# Altium PCB PCB_Air_Quality_chipout.pcbdoc
Units mm, origin at the board's own origin, x right, y up, seen from the top; angles counter-clockwise.
Board outline 125.48 x 101.47 mm, 2 copper layers (Top Layer, Bottom Layer); 49 components, 34 nets, 123 pads, 32 vias.
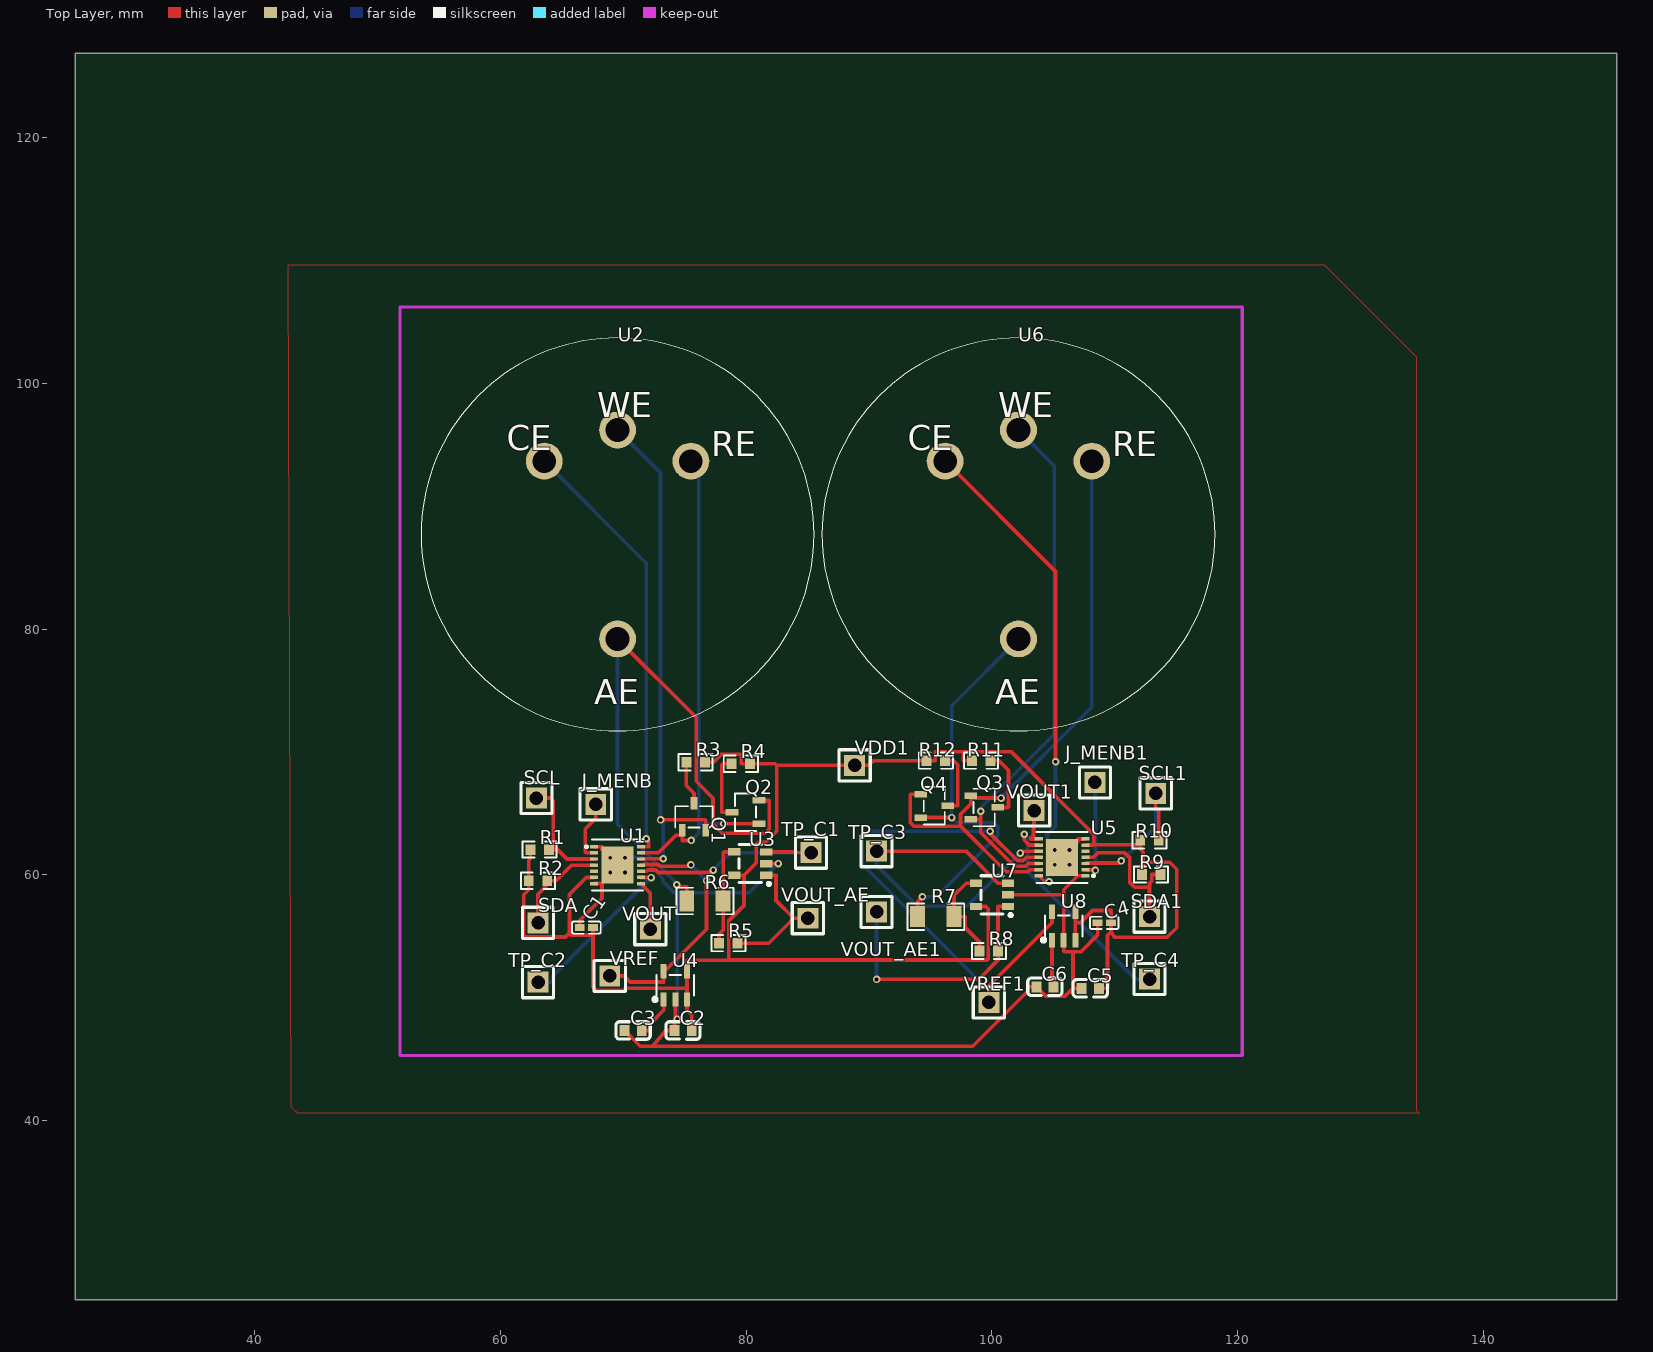
[diagram p0: Top Layer view]
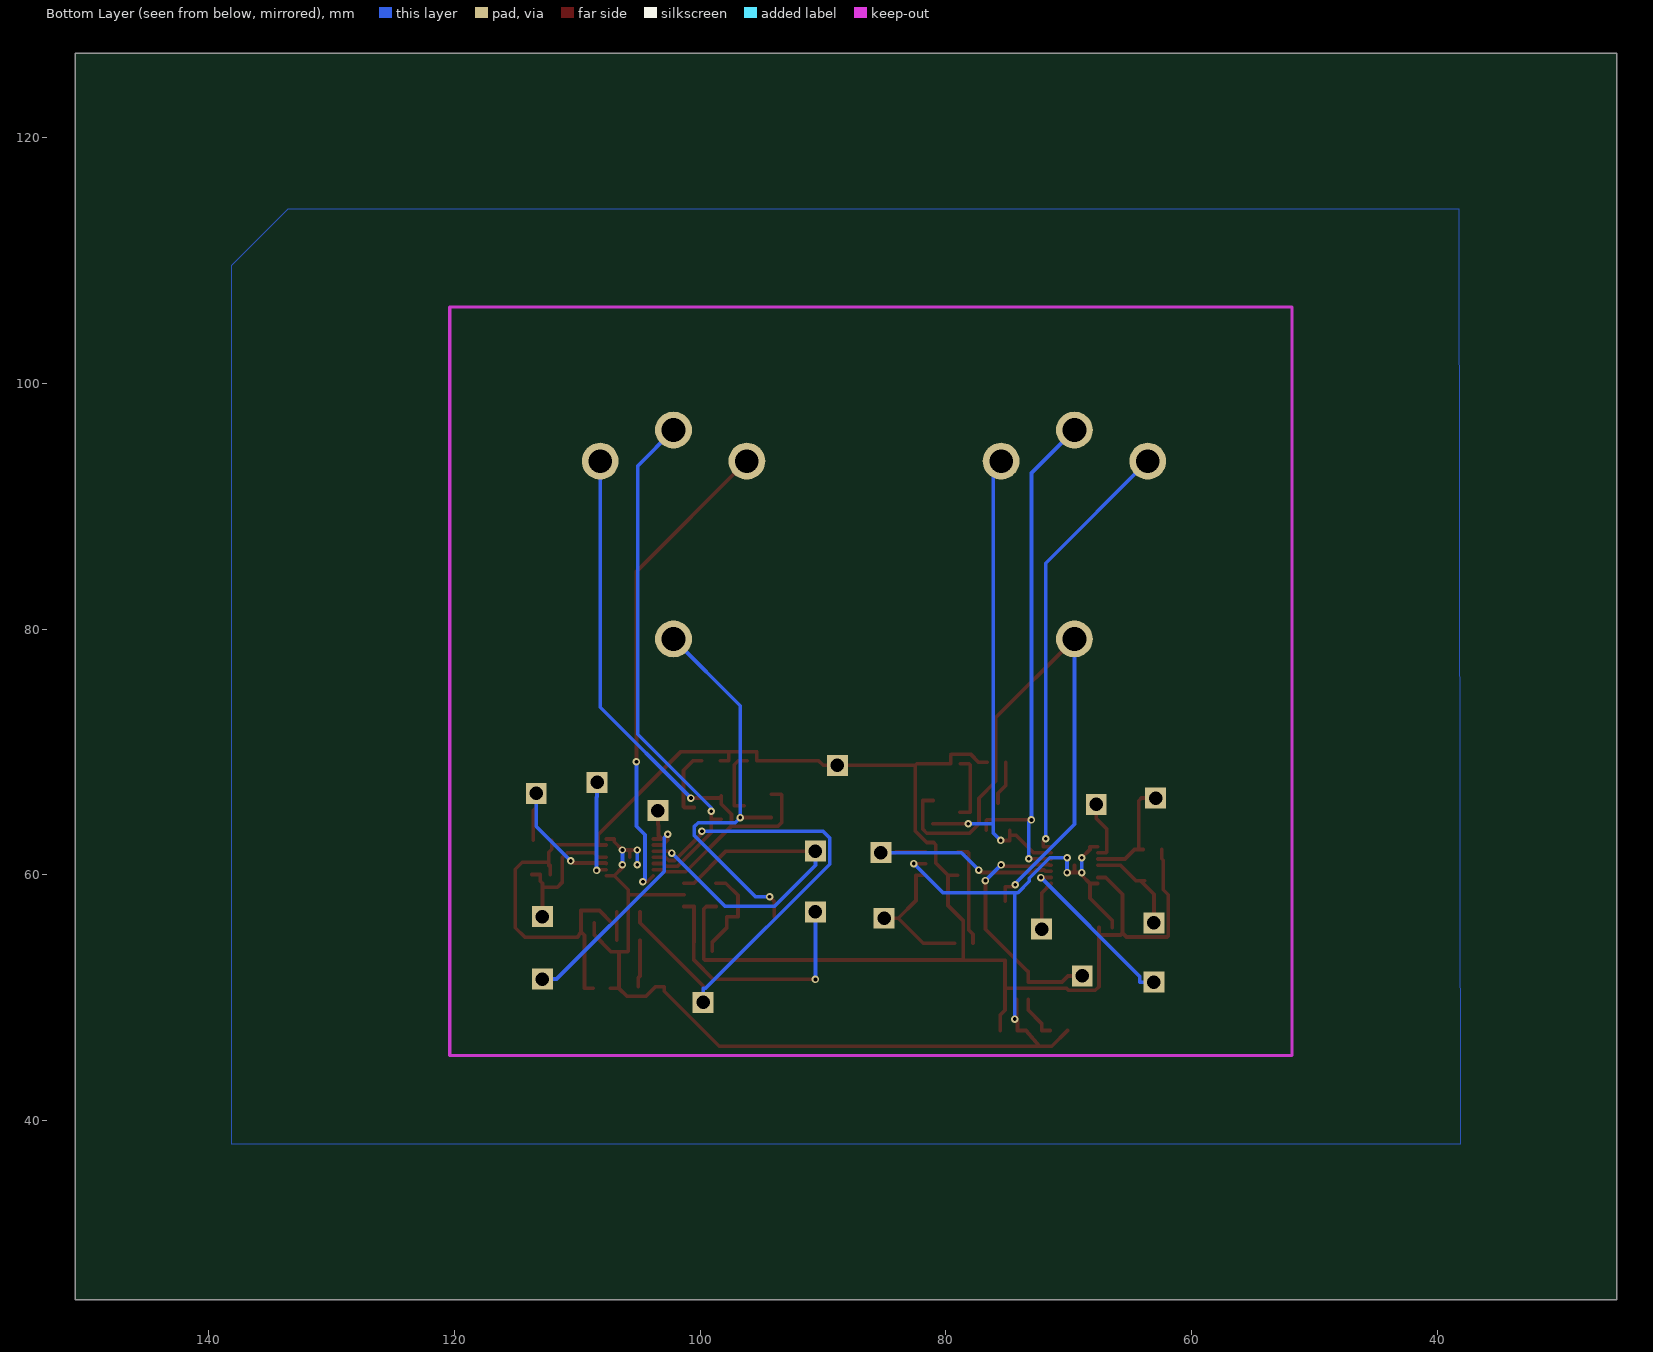
[diagram p1: Bottom Layer view, seen from below]

## Layer stack, top to bottom
Top Layer: signal copper (thickness not stored)
Dielectric: dielectric 0.32, FR-4, Dk 4.8
Bottom Layer: signal copper (thickness not stored)

## Board outline
150.876,25.4 25.4,25.4 25.4,126.873 150.876,126.873

## Components (designator, comment, footprint, x,y, rotation, side; value= is the part's Value field where it differs from the comment)
C1 "100nF" C0402 67.001,55.704 r0 top
C2 "100nF" C0603 74.875,47.322 r0 top
C3 "56pF" C0603 70.811,47.322 r0 top
C4 "100nF" C0402 109.165,56.085 r0 top
C5 "100nF" C0603 108.022,50.751 r0 top
C6 "56pF" C0603 104.339,50.878 r0 top
J_MENB "Header-Male-2.54_1x1" HDR-TH_1P-P2.54-V-M 67.763,65.737 r0 top
J_MENB1 "Header-Male-2.54_1x1" HDR-TH_1P-P2.54-V-M 108.403,67.515 r0 top
Q1 "MMBFJ177LT1G_C106763" SOT-23-3_L3.0-W1.7-P0.95-LS2.9-BR 75.764,64.721 r270 top
Q2 "MMBFJ177LT1G_C106763" SOT-23-3_L3.0-W1.7-P0.95-LS2.9-BR 79.955,65.102 r0 top
Q3 "MMBFJ177LT1G_C106763" SOT-23-3_L3.0-W1.7-P0.95-LS2.9-BR 99.386,65.483 r180 top
Q4 "MMBFJ177LT1G_C106763" SOT-23-3_L3.0-W1.7-P0.95-LS2.9-BR 95.322,65.61 r180 top
R1 "10K" R0603 63.191,62.054 r0 top
R2 "10K" R0603 63.064,59.514 r0 top
R3 "1K" R0603 75.891,69.166 r0 top
R4 "1K" R0603 79.574,69.039 r0 top
R5 "14K" R0603 78.558,54.434 r0 top
R6 "10" R1206 76.653,57.863 r0 top
R7 "10" R1206 95.449,56.593 r0 top
R8 "14K" R0603 99.767,53.799 r0 top
R9 "10K" R0603 112.975,60.022 r0 top
R10 "10K" R0603 112.848,62.816 r0 top
R11 "1K" R0603 99.132,69.293 r180 top
R12 "1K" R0603 95.449,69.293 r180 top
SCL "Header-Male-2.54_1x1" HDR-TH_1P-P2.54-V-M 62.937,66.245 r0 top
SCL1 "Header-Male-2.54_1x1" HDR-TH_1P-P2.54-V-M 113.356,66.626 r0 top
SDA "Header-Male-2.54_1x1" HDR-TH_1P-P2.54-V-M 63.064,56.085 r0 top
SDA1 "Header-Male-2.54_1x1" HDR-TH_1P-P2.54-V-M 112.848,56.593 r0 top
TP_C1 "Header-Male-2.54_1x1" HDR-TH_1P-P2.54-V-M 85.289,61.8 r0 top
TP_C2 "Header-Male-2.54_1x1" HDR-TH_1P-P2.54-V-M 63.064,51.259 r0 top
TP_C3 "Header-Male-2.54_1x1" HDR-TH_1P-P2.54-V-M 90.623,61.927 r0 top
TP_C4 "Header-Male-2.54_1x1" HDR-TH_1P-P2.54-V-M 112.848,51.513 r0 top
U1 "LMP91000SDE/NOPB" WSON-14_L4.0-W4.0-P0.50-BL-EP 69.541,60.784 r270 top
U2 "NO-B4" "ALPHASENSE B1" 69.541,87.708 r0 top
U3 "LMP2231AMFE/NOPB" SOT-23-5_L3.0-W1.7-P0.95-LS2.8-BR 80.336,60.911 r0 top
U4 "LM4120AIM5X-2.5/NOPB" SOT-23-5_L3.0-W1.7-P0.95-LS2.8-BL 74.24,51.005 r0 top
U5 "LMP91000SDE/NOPB" WSON-14_L4.0-W4.0-P0.50-BL-EP 105.736,61.419 r90 top
U6 "NO-B4" "ALPHASENSE B1" 102.18,87.708 r0 top
U7 "LMP2231AMFE/NOPB" SOT-23-5_L3.0-W1.7-P0.95-LS2.8-BR 100.021,58.371 r0 top
U8 "LM4120AIM5X-2.5/NOPB" SOT-23-5_L3.0-W1.7-P0.95-LS2.8-BL 105.863,55.831 r0 top
VDD1 "Header-Male-2.54_1x1" HDR-TH_1P-P2.54-V-M 88.845,68.912 r0 top
VOUT "Header-Male-2.54_1x1" HDR-TH_1P-P2.54-V-M 72.208,55.577 r0 top
VOUT1 "Header-Male-2.54_1x1" HDR-TH_1P-P2.54-V-M 103.45,65.229 r0 top
VOUT_AE "Header-Male-2.54_1x1" HDR-TH_1P-P2.54-V-M 85.035,56.466 r0 top
VOUT_AE1 "Header-Male-2.54_1x1" HDR-TH_1P-P2.54-V-M 90.623,56.974 r0 top
VREF "Header-Male-2.54_1x1" HDR-TH_1P-P2.54-V-M 68.906,51.767 r0 top
VREF1 "Header-Male-2.54_1x1" HDR-TH_1P-P2.54-V-M 99.767,49.608 r0 top
? "" ? 65.731,94.058 r0 top
? "" ? 98.37,94.058 r0 top

## Footprints (in the part's own frame and the unit in brackets; to place one, negate y for a bottom-side part, rotate by r counter-clockwise, add the part's x,y. Pads: shape width x height; smd on the part's side, far side on the other; paste and mask are expansions set on the pad)
"ALPHASENSE B1" [mm]
  silkscreen extent -16,-16 16,16
C0402 [mm]
  rect 0.79x0.54 smd paste-100 mask+0.051: 1(-0.545,0) 2(0.545,0)
  silkscreen extent -1.17,-0.5 1.17,0.5
C0603 [mm]
  rect 0.8x0.9 smd paste+0 mask+0.051: 1(-0.7,0) 2(0.7,0)
  silkscreen extent -1.41,-0.71 1.39,0.72
HDR-TH_1P-P2.54-V-M [mm]
  rect 1.7x1.7 hole 1.1 paste+0 mask+0.051: 1(0,0)
  silkscreen extent -1.27,-1.27 1.27,1.27
R0603 [mm]
  rect 0.806x0.864 smd paste-100 mask+0.051: 1(-0.753,0) 2(0.753,0)
  silkscreen extent -1.39,-0.66 1.39,0.66
R1206 [mm]
  rect 1.208x1.701 smd paste-100 mask+0.051: 1(-1.479,0) 2(1.479,0)
  silkscreen extent -2.31,-1.08 2.31,1.08
SOT-23-3_L3.0-W1.7-P0.95-LS2.9-BR [mm]
  rect 1.037x0.532 smd paste+0 mask+0.051: 1(1.101,-0.95) 2(1.101,0.95) 3(-1.101,0)
  silkscreen extent -0.86,-1.53 0.86,1.53
SOT-23-5_L3.0-W1.7-P0.95-LS2.8-BL [mm]
  rect 0.49x1.157 smd paste+0 mask+0.051: 1(-0.95,-1.154) 2(0,-1.154) 3(0.95,-1.154)
  rect 0.49x1.175 smd paste+0 mask+0.051: 4(0.95,1.154) 5(-0.95,1.154)
  silkscreen extent -1.8,-1.29 1.53,0.85
SOT-23-5_L3.0-W1.7-P0.95-LS2.8-BR [mm]
  rect 1x0.6 smd paste+0 mask+0.051: 1(1.3,-0.95) 2(1.3,0) 3(1.3,0.95) 4(-1.3,0.95) 5(-1.3,-0.95)
  silkscreen extent -0.9,-1.78 1.65,1.55
WSON-14_L4.0-W4.0-P0.50-BL-EP [mm]
  rect 0.28x0.665 smd paste+0 mask+0.051: 1(-1.5,-1.908) 2(-1,-1.908) 3(-0.5,-1.908) 4(0,-1.908) 5(0.5,-1.908) 6(1,-1.908) 7(1.5,-1.908) 8(1.5,1.907) 9(1,1.907) 10(0.5,1.907) 11(0,1.907) 12(-0.5,1.907) 13(-1,1.907) 14(-1.5,1.907)
  rect 3x2.6 smd paste+0 mask+0.051: 15(0,0)
  silkscreen extent -2.08,-2.64 2.08,2.08
? [mm]

## Free pads (board coordinates)
  round 3 hole 1.93 paste+0 mask+0.102: 1(69.541,96.208) 1(102.18,96.208) 2(63.572,93.677) 2(96.211,93.677) 3(75.51,93.677) 3(108.149,93.677) 4(69.541,79.199) 4(102.18,79.199)

## Via types
v1: diameter 0.61, hole 0.305, Top Layer to Bottom Layer, tented both sides, 32 vias

## Nets (pads, with @x,y where several pads share a name; then routed paths per layer and width w, separated by ;. In a path a pad name is that pad's centre, name@x,y a point inside that pad or via, vN(x,y) a via of type N, cw(c..) or ccw(c..) an arc to the next point about the centre after c; other vN are vias at no path point)
C3_2: C3.2 U4.1 | length 3.7
  Top Layer w0.3: C3.2 72.214,47.322 72.214,47.894 73.29,48.97 U4.1
GND: C1.1 C2.1 C3.1 C4.1 C5.1 C6.1 U1.1 U1.7 U1.15 U3.2 U4.2 U5.1 U5.7 U5.15 U7.2 U8.2 | length 110.1
  Top Layer w0.3: C1.1 66.456,56.276 68.269,58.088 U1.15@68.269,59.284 ; U1.7 U1.15@68.269,59.284 ; U1.1 68.269,62.284 68.269,62.057 v1(68.941,61.384) ; U1.15 U1.15@69.541,60.184 ; C3.1 71.397,46.038 72.372,46.038 ; v1(70.141,60.184) U1.15@69.541,60.184 ; U4.2 v1@74.24,48.259 ; v1(74.396,48.259) v1@74.24,48.259 ; U3.2 v1(82.614,60.911) ; U7.2 102.124,58.371 105.863,58.371 ; 102.936,50.879 102.936,50.526 98.448,46.038 72.372,46.038 ; 102.937,50.878 C6.1 104.394,50.124 105.993,50.124 106.62,50.751 ; v1(105.136,62.019) U5.15@105.736,62.018 ; U5.15 U5.15@105.736,62.018 ; v1(106.336,60.818) 106.336,60.591 U5.15@107.009,59.919 ; C5.1 106.62,50.751 ; U5.1@107.644,59.919 U5.15@107.009,59.919 ; U5.7@107.644,62.919 107.009,62.919 107.009,62.691 v1(106.337,62.018) U5.15@105.736,62.018 ; C4.1 108.62,55.1 107.265,53.744 106.62,53.744 ; U1.15@68.269,59.284 68.941,59.956 v1(68.941,60.184) U1.15@69.541,60.184 ; 72.372,46.038 73.473,47.322 C2.1 74.175,48.074 74.24,48.139 v1@74.24,48.259 ; 105.863,58.371 105.863,58.773 U5.15@107.009,59.919 ; 105.863,58.371 105.863,55.558 U8.2 105.863,54.237 105.863,53.796 105.915,53.744 106.62,53.744 ; 106.62,50.751 106.62,53.744
  Bottom Layer w0.3: v1@68.942,60.184 v1(68.941,61.384) ; v1(70.141,60.184) v1(70.142,61.384) ; v1(70.142,61.384) 71.56,61.384 73.22,59.724 73.22,59.473 74.145,58.548 74.396,58.548 ; v1(74.396,48.259) 74.396,58.548 ; v1(82.614,60.911) 80.25,58.548 74.396,58.548 ; v1(105.136,60.819) v1(105.136,62.019) ; v1(106.336,60.818) v1(106.337,62.018)
J_MENB1_1: J_MENB1.1 U5.2 | length 8
  Top Layer w0.3: U5.2@107.644,60.419 108.279,60.419 108.382,60.419 v1(108.445,60.355)
  Bottom Layer w0.3: J_MENB1.1 108.403,66.363 108.445,66.321 v1(108.445,60.355)
R3_1: Q1.3 R3.1 | length 3.6
  Top Layer w0.3: R3.1 75.138,67.269 75.764,66.643 Q1.3
R4_1: Q2.3 R4.1 | length 5.5
  Top Layer w0.3: R4.1 78.116,69.039 78.033,68.956 78.033,65.102 Q2.3
R7_1: pad.4@102.18,79.199 Q4.2 R7.1 | length 34.1
  Top Layer w0.3: R7.1 93.971,57.83 v1(94.357,58.216) ; Q4.2 v1(96.741,64.66)
  Bottom Layer w0.3: v1(94.357,58.216) 95.5,58.216 100.488,63.204 100.488,63.929 100.172,64.245 97.156,64.245 v1(96.741,64.66) 96.741,73.76 pad.4@102.18,79.199
R7_2: R7.2 R8.1 U7.4 | length 8.1
  Top Layer w0.3: U7.4 97.919,59.321 96.928,58.33 R7.2 97.834,56.593 97.834,55.713 99.014,54.533 R8.1
R8_2: R8.2 U7.1 VOUT_AE1.1 | length 21.2
  Top Layer w0.3: v1@90.623,51.484 98.941,51.484 100.521,53.064 R8.2 100.521,54.166 100.521,54.533 100.519,54.535 100.519,57.421 U7.1
  Bottom Layer w0.3: v1@90.623,51.484 VOUT_AE1.1
  other v1: 90.623,51.484
R11_1: Q3.3 R11.1 | length 5.7
  Top Layer w0.3: R11.1 100.591,69.293 101.371,68.512 101.371,65.546 101.309,65.483 Q3.3
R12_1: Q4.3 R12.1 | length 5.3
  Top Layer w0.3: R12.1 96.908,69.293 97.245,68.956 97.245,65.61 Q4.3
SCL1_1: R10.2 SCL1.1 U5.3 | length 13.6
  Top Layer w0.3: U5.3@107.644,60.919 107.69,60.965 110.38,60.965 v1(110.545,61.129) ; SCL1.1 113.356,65.474 113.602,65.228 R10.2
  Bottom Layer w0.3: v1(110.545,61.129) 113.356,63.941 SCL1.1
SDA1_1: R9.2 SDA1.1 U5.4 | length 12.2
  Top Layer w0.3: U5.4@107.644,61.419 108.279,61.419 ; 108.278,61.42 108.656,61.796 110.815,61.796 111.249,61.361 111.249,59.375 111.633,58.991 112.85,58.991 112.85,59.286 ; SDA1.1 112.848,57.745 112.848,59.286 113.03,59.499 113.023,60.022 R9.2
TP_C3_1: TP_C3.1 U5.10 U7.3 | length 29.4
  Top Layer w0.3: TP_C3.1 97.913,61.927 100.519,59.321 U7.3 ; v1(102.322,61.767) 102.474,61.919 U5.10
  Bottom Layer w0.3: TP_C3.1 90.623,60.775 93.956,57.442 97.997,57.442 v1(102.322,61.767)
TP_C4_1: TP_C4.1 U5.9 | length 18.5
  Top Layer w0.3: v1(102.65,63.309) 102.65,62.812 103.043,62.419 U5.9
  Bottom Layer w0.3: v1(102.65,63.309) 102.931,63.028 102.931,60.278 111.696,51.513 TP_C4.1
U1_2: J_MENB.1 U1.2 | length 5
  Top Layer w0.3: U1.2 66.999,61.784 66.921,61.862 66.921,63.742 67.763,64.585 J_MENB.1
U1_3: R1.2 SCL.1 U1.3 | length 9.4
  Top Layer w0.3: SCL.1 64.09,66.245 64.298,66.037 R1.2@64.298,62.054 ; R1.2 R1.2@64.298,62.054 ; U1.3 65.42,61.284 64.65,62.054 R1.2@64.298,62.054
U1_4: R2.2 SDA.1 U1.4 | length 8.2
  Top Layer w0.3: SDA.1 63.064,58.408 R2.2@64.171,59.514 ; R2.2 R2.2@64.171,59.514 ; U1.4 65.793,60.784 64.523,59.514 R2.2@64.171,59.514
U1_8: U1.8 VOUT.1 | length 4
  Top Layer w0.3: U1.8@71.449,59.284 72.208,58.524 VOUT.1
U1_9: TP_C2.1 U1.9 | length 13.8
  Top Layer w0.3: U1.9@71.449,59.784 72.084,59.784 72.259,59.784 v1(72.266,59.777)
  Bottom Layer w0.3: TP_C2.1 64.217,51.259 64.217,51.728 v1(72.266,59.777)
U2_1: pad.1@69.541,96.208 Q1.2 U1.12 | length 42.8
  Top Layer w0.3: U1.12@71.449,61.284 71.477,61.312 v1(73.252,61.312) ; v1(73.04,64.469) 76.686,64.469 76.714,64.441 76.714,64.03 Q1.2
  Bottom Layer w0.3: pad.1@69.541,96.208 73.041,92.709 v1(73.04,64.469) 73.252,64.258 v1(73.252,61.312)
U2_2: pad.2@63.572,93.677 U1.14 | length 35.6
  Top Layer w0.3: U1.14@71.449,62.284 72.084,62.284 72.084,62.727 v1(71.882,62.928)
  Bottom Layer w0.3: pad.2@63.572,93.677 71.882,85.367 v1(71.882,62.928)
U2_3: pad.3@75.51,93.677 Q1.1 Q2.1 U1.13 | length 41.8
  Top Layer w0.3: U1.13@71.449,61.784 72.863,61.784 74.288,63.209 Q1.1@74.814,63.209 ; Q1.1 Q1.1@74.814,63.209 ; v1(75.54,62.798) 74.814,62.798 Q1.1@74.814,63.209 ; v1(78.185,64.152) Q2.1
  Bottom Layer w0.3: pad.3@75.51,93.677 76.141,93.046 76.141,64.152 ; v1(75.54,62.798) 76.141,63.4 76.141,64.152 ; v1(78.185,64.152) 76.141,64.152
U2_4: pad.4@69.541,79.199 Q2.2 R6.1 | length 50.5
  Top Layer w0.3: pad.4@69.541,79.199 75.937,72.803 75.937,67.611 77.307,66.241 77.307,64.164 78.08,63.391 81.57,63.391 81.88,63.7 81.88,66.05 81.878,66.052 Q2.2 ; v1(74.361,59.193) 74.538,59.015 75.175,59.015 R6.1
  Bottom Layer w0.3: pad.4@69.541,79.199 69.541,64.117 74.361,59.297 v1(74.361,59.193)
U3_1: R5.2 U3.1 VOUT_AE.1 | length 11.5
  Top Layer w0.3: R5.2 81.851,54.434 83.883,56.466 ; U3.1 82.439,59.961 82.439,57.91 83.883,56.466 ; VOUT_AE.1 83.883,56.466
U3_3: TP_C1.1 U1.10 U3.3 | length 18.3
  Top Layer w0.3: U1.10@71.449,60.284 71.891,60.284 71.994,60.386 72.675,60.386 72.868,60.193 77.138,60.193 v1(77.331,60.386) ; U3.3 84.076,61.861 84.137,61.8 TP_C1.1
  Bottom Layer w0.3: v1(77.331,60.386) 78.745,61.8 TP_C1.1
U3_4: R5.1 R6.2 U3.4 | length 8.4
  Top Layer w0.3: R5.1 77.805,55.168 78.132,55.495 R6.2 78.132,61.759 78.234,61.861 U3.4
U4_5: U1.11 U4.5 VREF.1 | length 20.4
  Top Layer w0.3: VREF.1 70.059,51.767 70.557,51.269 73.29,51.269 U4.5@73.29,52.073 ; U1.11@71.449,60.784 71.591,60.784 71.647,60.84 72.863,60.84 73,60.703 75.416,60.703 v1(75.515,60.802) ; U4.5 U4.5@73.29,52.073 ; v1(76.784,59.533) 76.784,55.566 U4.5@73.29,52.073
  Bottom Layer w0.3: v1(75.515,60.802) v1(76.784,59.533)
U5_12: pad.1@102.18,96.208 Q3.2 U5.12 | length 43.2
  Top Layer w0.3: Q3.2 99.106,64.533 ; v1(99.106,65.175) 99.106,64.533 ; U5.12 102.977,60.919 102.763,60.705 101.848,60.705 99.106,63.446 99.106,64.533
  Bottom Layer w0.3: v1(99.106,65.175) 99.106,65.454 105.101,71.449 105.101,93.287 pad.1@102.18,96.208
U5_13: pad.3@108.149,93.677 Q3.1 Q4.1 U5.13 | length 51.1
  Top Layer w0.3: Q4.1 93.4,66.56 93.36,66.52 93.36,64.25 93.647,63.963 97.462,63.963 ; Q3.1 Q3.1@98.285,66.25 ; v1@100.763,66.25 Q3.1@98.285,66.25 ; U5.13 103.119,60.419 102.951,60.251 101.174,60.251 97.462,63.963 ; 97.462,63.963 97.462,64.932 98.285,65.755 Q3.1@98.285,66.25
  Bottom Layer w0.3: v1@100.763,66.25 108.149,73.636 pad.3@108.149,93.677
  other v1: 100.763,66.25
U5_14: pad.2@96.211,93.677 U5.14 | length 39.4
  Top Layer w0.3: pad.2@96.211,93.677 105.194,84.694 v1(105.194,69.193) ; U5.14 104.322,59.426 v1(104.668,59.426)
  Bottom Layer w0.3: v1(104.668,59.426) 104.501,59.593 104.501,63.26 105.194,63.953 v1(105.194,69.193)
U8_1: C6.2 U8.1 | length 3.9
  Top Layer w0.3: U8.1 104.913,51.756 105.039,51.63 C6.2
VDD: C1.2 C2.2 C4.2 C5.2 R1.1 R2.1 R3.2 R4.2 R9.1 R10.1 R11.2 R12.2 U1.6 U3.5 U4.3 U4.4 U5.6 U7.5 U8.3 U8.4 VDD1.1 | length 158.5
  Top Layer w0.3: R1.1 62.438,61.319 62.311,61.192 R2.1 62.311,58.779 61.911,58.379 61.911,55.018 61.998,54.931 65.297,54.931 65.63,55.264 ; C1.2 67.547,55.097 ; U1.6 67.494,59.784 67.317,59.784 66.999,59.784 65.63,58.414 65.63,55.264 ; C2.2 75.575,48.585 75.19,48.97 U4.3 75.19,50.774 ; R3.2 77.35,69.166 78.01,69.825 79.541,69.825 79.622,69.744 79.622,69.039 R4.2 82.379,69.039 82.506,68.912 ; U3.5 79.839,59.961 ; R11.2 97.674,69.293 97.674,70.029 ; U7.5 99.524,57.421 99.721,57.223 99.721,53.15 99.634,53.063 78.604,53.063 ; U8.3 106.813,56.095 U8.4 ; 106.815,56.096 107.218,56.096 108.209,57.087 109.71,57.087 109.71,56.657 C4.2 109.711,55.513 109.711,55.37 ; U5.6@107.644,62.419 108.279,62.419 108.309,62.449 ; C5.2 109.425,50.751 109.425,55.084 109.711,55.37 ; R10.1 R10.1@112.095,62.449 ; R9.1 112.222,60.756 112.332,60.756 112.334,60.758 112.334,61.843 112.095,62.081 R10.1@112.095,62.449 ; 112.334,60.757 112.334,61.023 114.485,61.023 115.062,60.447 115.062,55.689 114.3,54.927 109.982,54.927 109.71,55.369 ; 65.63,55.264 65.796,55.097 67.547,55.097 ; 67.547,55.097 67.547,50.893 67.84,50.599 70.028,50.599 70.203,50.774 75.19,50.774 ; 75.19,50.774 U4.4 75.19,53.048 78.59,53.048 78.604,53.063 ; 78.604,53.063 78.604,56.273 79.839,57.507 79.839,59.961 ; 79.839,59.961 80.833,60.955 80.833,62.443 81.017,62.628 81.571,62.628 82.506,63.563 82.506,68.912 ; 82.506,68.912 87.693,68.912 VDD1.1 89.998,68.912 90.379,69.293 R12.2 95.049,69.293 95.402,69.293 95.402,69.998 95.432,70.029 97.674,70.029 ; 97.674,70.029 101.568,70.029 108.309,63.287 108.309,62.449 ; 108.309,62.449 R10.1@112.095,62.449
VOUT1_1: U5.8 VOUT1.1 | length 3.1
  Top Layer w0.3: VOUT1.1 103.45,64.077 103.398,64.024 103.398,63.196 103.194,62.992 103.194,62.919 U5.8
VREF1_1: U5.11 U8.5 VREF1.1 | length 43.1
  Top Layer w0.3: VREF1.1 99.767,50.949 104.913,56.095 U8.5 ; v1(99.865,63.549) 99.865,63.364 102.07,61.159 102.575,61.159 102.835,61.419 U5.11
  Bottom Layer w0.3: VREF1.1 99.767,50.76 99.567,50.76 89.461,60.867 89.461,62.993 90.016,63.549 v1(99.865,63.549)
pads on no net: U1.5 U5.5

## Polygon pours and split planes (outlines as drawn)
GND on Bottom Layer (solid): 38.227,114.173 133.604,114.173 138.176,109.601 138.176,38.1 38.1,38.1
GND on Top Layer (solid): 42.735,109.664 127.063,109.664 134.556,102.171 134.556,40.831 134.81,40.576 43.497,40.576 42.989,41.084

## Silkscreen, mask and mechanical layers (free items; w line width, h text height)
Top Overlay:
  text "WE" at 67.89,97.233 h2.03
  text "WE" at 100.529,97.233 h2.03
  text "CE" at 60.524,94.566 h2.03
  text "CE" at 93.163,94.566 h2.03
  text "RE" at 77.161,94.058 h2.03
  text "RE" at 109.8,94.058 h2.03
  text "AE" at 67.636,73.865 h2.03
  text "AE" at 100.275,73.865 h2.03